# Altium PCB +-15V.PcbDoc
Units mm, origin at the board's own origin, x right, y up, seen from the top; angles counter-clockwise.
Board outline 45 x 32 mm, 2 copper layers (Component Side, Bottom Layer), stack 1.571 mm thick; 35 components, 14 nets, 77 pads, 2 vias.
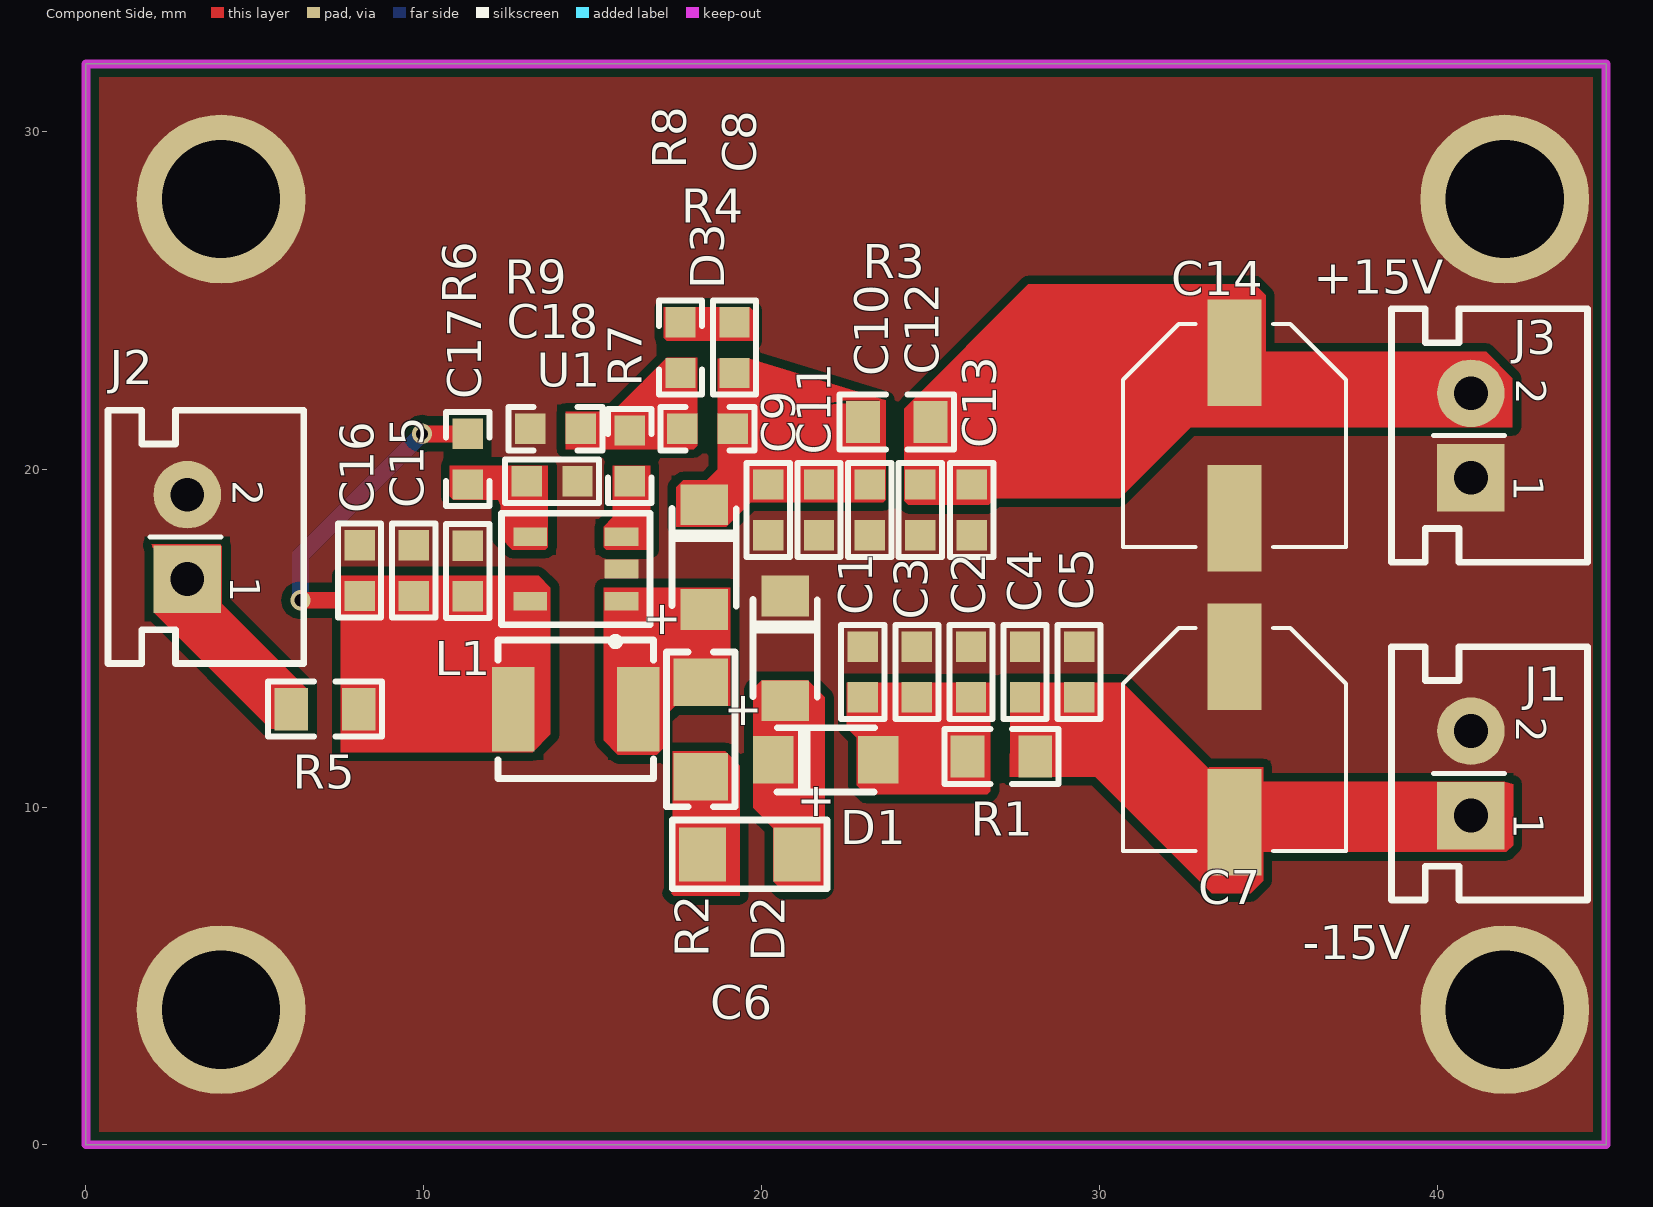
[diagram p0: Component Side view]
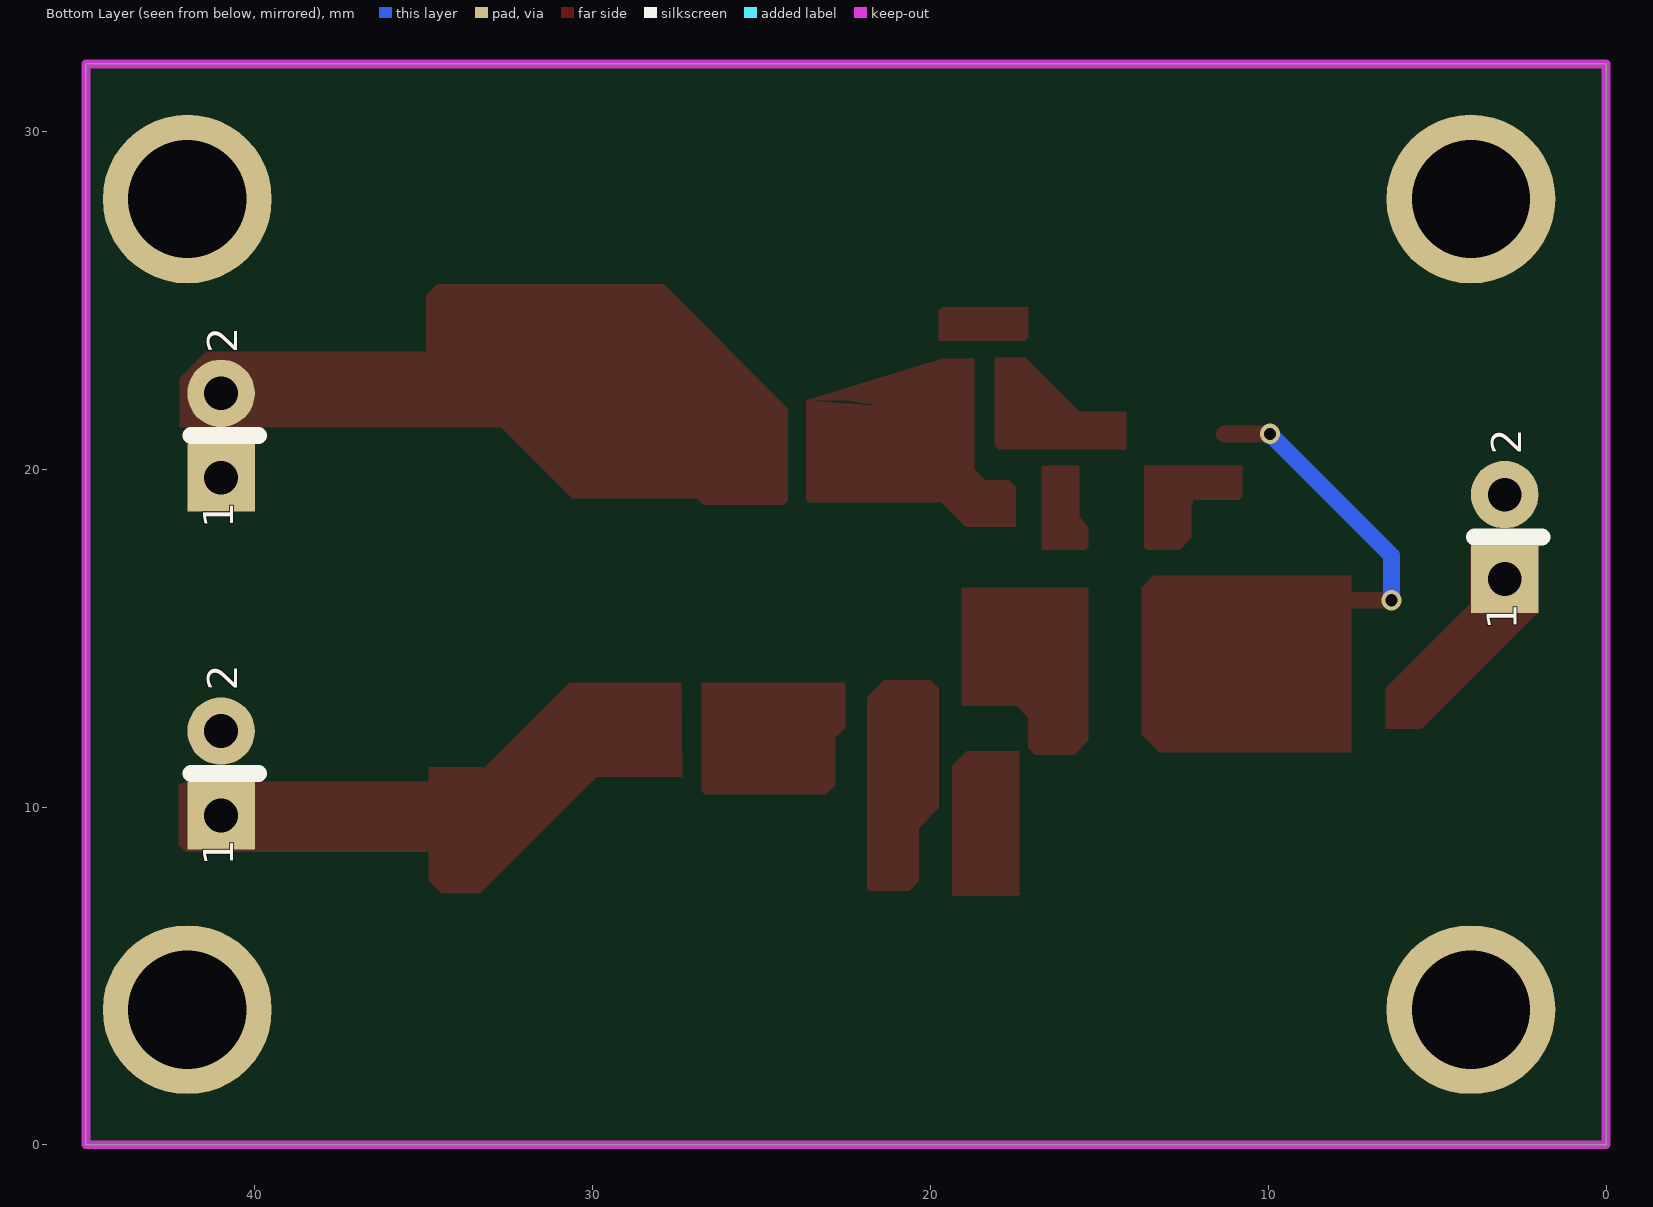
[diagram p1: Bottom Layer view, seen from below]

## Layer stack, top to bottom
Top Solder: solder mask 0.0102, Solder Resist, Dk 3.5
Component Side: signal copper 0.0356
Dielectric 1: core 1.5, FR-4, Dk 4.2
Bottom Layer: signal copper 0.0356
Solder Side: solder mask 0.0102, Solder Resist, Dk 3.5

## Board outline
0,0 45,0 45,32 0,32

## Design rules (kind name [scope] priority, off if disabled: settings)
Clearance [All] p1: gap=0.254 ignorepadtopadclearanceinfootprint=FALSE except(0: Arc-Hole Track-Hole SMDPad-Hole THPad-Hole Via-Hole Fill-Hole Poly-Hole Region-Hole Text-Hole)
PolygonConnect "Polygon pore GND" [InNet('GND')] p1: connectstyle=Direct reliefconductorwidth=0.254 reliefentries=4 polygonreliefangle="90 Angle" airgapwidth=0.254
PolygonConnect [All] p2: connectstyle=Relief reliefconductorwidth=0.254 reliefentries=4 polygonreliefangle="90 Angle" airgapwidth=0.254
RoutingVias [All] p1: holewidth=0.711 width=1.27 viastyle="Through Hole" minholewidth=0.711 minwidth=1.27 maxholewidth=0.711 maxwidth=1.27
SolderMaskExpansion [All] p1: expansion=0.102
Width [All] p1: maxlimit=1 minlimit=0.254 preferedwidth=0.254
30 further rules are at their usual default settings.

## Components (designator, comment, footprint, x,y, rotation, side; value= is the part's Value field where it differs from the comment)
C1 "T542021047508" CAPC0603-RW 23,14 r90 top value=0.1uF
C2 "T542024757408" CAPC0603-RW 26.2,14 r90 top value=4.7uF
C3 "T542024757408" CAPC0603-RW 24.6,14 r90 top value=4.7uF
C4 "T542024757408" CAPC0603-RW 27.8,14 r90 top value=NC
C5 "CAP0603 NC" CAPC0603-RW 29.4,14 r90 top value=NC
C6 "PZL456450-1050" CAPC1206-RW 19.65,8.6 r180 top value=1uF
C7 "T551101445020" "CASE - D8" 34,12 r270 top value=100uF
C8 "PXL456470-2230" CAPC0603-RW 19.2,23.6 r90 top value=0.022uF
C9 "T542021047508" CAPC0603-RW 20.2,18.8 r270 top value=0.1uF
C10 "T542024757408" CAPC0603-RW 23.2,18.8 r270 top value=4.7uF
C11 "T542024757408" CAPC0603-RW 21.7,18.8 r270 top value=4.7uF
C12 "T542024757408" CAPC0603-RW 24.7,18.8 r270 top value=NC
C13 "T542024757408" CAPC0603-RW 26.225,18.8 r270 top value=NC
C14 "T551101445020" "CASE - D8" 34,21 r270 top value=100uF
C15 "T542024757408" CAPC0603-RW 9.7,17 r90 top value=4.7uF
C16 "T542024757408" CAPC0603-RW 8.1,17 r90 top value=4.7uF
C17 "T542021047508" CAPC0603-RW 11.3,16.987 r90 top value=0.1uF
C18 "T542021047508" CAPC0603-RW 13.8,19.65 r0 top value=0.1uF
D1 "RCD100140-0010" subSMA 21.9,11.4 r180 top
D2 "RCD100140-0010" subSMA 20.7,14.7 r90 top
D3 "RCD100140-0010" subSMA 18.3,17.4 r90 top
J1 "CCN250000-0102" "CONN 2P PH=2.5mm B2B-XH-A" 41,11 r270 top value=2.5mm
J2 "CCN250000-0102" "CONN 2P PH=2.5mm B2B-XH-A" 3,18 r270 top value=2.5mm
J3 "CCN250000-0102" "CONN 2P PH=2.5mm B2B-XH-A" 41,21 r270 top value=2.5mm
L1 "T621000053100" "IND CKST0402" 14.5,12.9 r0 top value=10uH
R1 "T502000003009" 0805-RW 27.1,11.5 r0 top value=0R
R2 "QCF045010-1000" 1206-RW 18.2,12.3 r270 top value=10R
R3 "T502000003009" 0805-RW 24,21.4 r0 top value=0R
R4 "QCF011030-1103" 0603-RW 18.4,21.2 r0 top value=110K
R5 "T502000003009" 0805-RW 7.075,12.9 r0 top value=0R
R6 "QCF011030-2204" 0603-RW 11.3,20.3 r90 top value=2.2M
R7 "QCF011030-1002" 0603-RW 16.1,20.4 r270 top value=10K
R8 "QCF011030-1002" 0603-RW 17.6,23.6 r270 top value=10K
R9 "QCF011030-1002" 0603-RW 13.9,21.2 r0 top value=10K
U1 "MP1541DJ" "SOT23-5 P.95" 14.5,17.05 r90 top

## Footprints (in the part's own frame and the unit in brackets; to place one, negate y for a bottom-side part, rotate by r counter-clockwise, add the part's x,y. Pads: shape width x height; smd on the part's side, far side on the other; paste and mask are expansions set on the pad)
0603-RW [mm]
  rect 0.9x0.9 smd: 1(-0.75,0) 2(0.75,0)
  silkscreen extent -1.39,-0.64 1.39,0.64, body extent -0.8,-0.41 0.8,0.39, height 0.3
0805-RW [mm]
  rect 1x1.25 smd: 1(-1,0) 2(1,0)
  silkscreen extent -1.69,-0.82 1.69,0.82, body extent -1,-0.64 1,0.62, height 0.78
1206-RW [mm]
  rect 1.4x1.6 smd: 1(-1.4,0) 2(1.4,0)
  silkscreen extent -2.29,-1.02 2.29,1.02, body extent -1.6,-0.8 1.6,0.8, height 1
CAPC0603-RW [mm] "Body size:  L1.6XW0.8XT0.8mm"
  rect 0.9x0.9 smd: 1(-0.75,0) 2(0.75,0)
  silkscreen extent -1.39,-0.64 1.39,0.64, body extent -0.8,-0.4 0.8,0.4, height 0.8
CAPC1206-RW [mm] "Body size: L3.2XW1.6XT1.0mm"
  rect 1.4x1.6 smd: 1(-1.4,0) 2(1.4,0)
  silkscreen extent -2.29,-1.02 2.29,1.02, body extent -1.6,-0.8 1.6,0.8, height 1
"CASE - D8" [mm] "CHIP ELECT CAP D6.3mm * H7.9mm"
  rect 3.15x1.6 smd: 1(-2.45,0) 2(2.45,0)
  silkscreen extent -3.3,-3.3 3.3,3.3, body extent -3.55,-3.38 3.45,3.22, height 7.7
"CONN 2P PH=2.5mm B2B-XH-A" [mm] "CONN 2P PH=2.5mm B2B-XH-A H7mm"
  rect 2x2 hole 1: 1(1.25,0)
  round 2 hole 1: 2(-1.25,0)
  silkscreen extent -3.75,-2.35 3.75,3.45, body extent -3.7,-2.32 3.7,3.43, height 7
"IND CKST0402" [mm] "4.1X4.6X2.0MM PH3.7MM PAD2.5X1.26MM"
  rect 1.26x2.5 smd: 1(-1.85,0) 2(1.85,0)
  silkscreen extent -2.3,-2.05 2.3,2.05, body extent -2.32,-2.05 2.32,2.05, height 2
"SOT23-5 P.95" [mm]
  rect 0.55x1 smd: 1(-0.95,-1.35) 2(0,-1.35) 3(0.95,-1.35) 4(0.95,1.35) 5(-0.95,1.35)
  silkscreen extent -2.25,-2.2 1.65,2.2, body extent -1.52,-1.5 1.53,1.5, height 1.4
subSMA [mm] "subSMA Body W 1.90mm L 2.90mm Max"
  rect 1.2x1.4 smd: 1(-1.55,0) 2(1.55,0)
  silkscreen extent -1.45,-0.95 1.44,0.95, body extent -1.86,-0.91 1.84,0.89, height 1.35

## Part data
C1 C9 C17 C18: library part "CAP0603 0.1uF 50V 10%_X7R", "CAP X7R .10UF 50V +-10% 0603 WALSIN L", PACKAGE=CAPC0603, Tolerance=10%, Voltage=50V, CREATE_NAME=Nathan, CREATE_TIME=30-Jul-2019, Customer Specific=N/A, DIP&SMD=SMD, MFG=WALSIN, MFG Part=0603B104K500, Other=X7R, SAP=T542021047508, Type=Capacitor
C2 C3 C10 C11 C15 C16: library part "CAP0603 4.7uF 25V 10%_X7R_WALSIN", "CAP X7R 4.7UF 25V +-10% 0603 WALSIN L", PACKAGE=CAPC0603, Tolerance=10%, Voltage=25V, CREATE_NAME=Nathan, CREATE_TIME=13-July-2016, Customer Specific=N/A, DIP&SMD=SMD, MFG=WALSIN, Other=X7R, SAP=T542024757408, Type=Capacitor
C4 C12 C13: library part "CAP0603 NC", "NC", PACKAGE=CAPC0603, CREATE_NAME=Tom, CREATE_TIME=18-Mar-2016, Customer Specific=N/A, DIP&SMD=SMD, Type=Capacitor
C5: "NC", PACKAGE=CAPC0603, CREATE_NAME=Tom, CREATE_TIME=18-Mar-2016, Customer Specific=N/A, DIP&SMD=SMD, Type=Capacitor
C6: library part "CAPC1206 1uF 25V 10% - PZL456450-1050", "GP CHIP CAP  1uF 25V 10%", PACKAGE=CAPC1206, Tolerance=10%, Voltage=25V, Customer Specific=N/A, DIP&SMD=SMD, SAP=T542041057408, Type=Capacitor, Vendor Code=10010262, Vendor Name=¶«Ý¸ÊÐÇ
C7 C14: library part "CAP E 100uF 25V 20% SMD_VEJ101M1ETR-0607", "E 100UF 25V +-20% 6.3X7. VEJ101M1E K", PACKAGE="CASE - C7.7", Tolerance=20%, Voltage=25V, CREATE_NAME=Nathan, CREATE_TIME=01-Mar-2019, Customer Specific=N/A, DIP&SMD=SMD, MFG=LELON, MFG Part=VEJ101M1ETR-0607, SAP=T551101445020, Type=Capacitor
C8: library part "CAP0603 0.022uF 50V 10%", "GP CHIP CAP 0.022uF 50V 10%", PACKAGE=CAPC0603, Tolerance=10%, Voltage=50V, Customer Specific=N/A, DIP&SMD=SMD, SAP=T542022237508, Type=Capacitor, Vendor Code=10010262, Vendor Name=¶«Ý¸ÊÐÇ
D1 D2 D3: library part SS14L-TSC, "SMD Schottky Diode Sub SMA 1A 40V SS14L", Current=1A, PACKAGE=SMA, Voltage=40V, Customer Specific=N/A, DIP&SMD=SMD, MFG=TSC, MFG Part=SS14L, SAP=T571000130604, Type=DIODE
J1 J2 J3: library part "CONN 2P PH=2.5mm B2B-XH-A", "GP CONNECTOR B2B-XH-A 2 PIN G", Current=3A, DIP&SMD=DIP, MFG=½ðÈ, MFG Part=HAA250A-2A-WHITE, SAP=T690300041200, Type=Connector, Vendor Code=10009989, Vendor Name=亿源电
L1: library part "IND 10uH CKST0402-10uH/M", "10UH 2A 100K SMD CENKER CKST040 K", CREATE_NAME=Nathan, CREATE_TIME=27-Sep-2017, DCR=294mΩ, DIP&SMD=SMD, Irms=1.6A, Isat=2A, MFG=CENKER, MFG Part=CKST0402-10uH/M, SAP=T621000053100, Type=INDUCTOR
R1 R3 R5: library part "RES0805 1/8W  0 OHM_WALSIN", "CHIP 0 OHM 0 OHM 0 OHM 0805 WALSI L", PACKAGE=0805, Power=1/8W, CREATE_NAME=Tom, CREATE_TIME=27-Jun-2018, Customer Specific=N/A, DIP&SMD=SMD, MFG=WALSIN, SAP=T502000003009, Type=Resistor
R2: library part "RES1206 1/4W 5% 10 OHM", "CHIP 10 OHM 100PPM +-5% 1206 WALS L", PACKAGE=1206, Power=1/4W, Customer Specific=N/A, DIP&SMD=SMD, MFG="WALSIN (ÈAÐ", SAP=T502010004499, TOL=5%, Type=Resistor, Vendor Code=10010262, Vendor Name=¶«Ý¸ÊÐÇ
R4: library part "RES0603 1/10W 1% 110K OHM", "CHIP RES 110K OHM 1/10W 1% 0603", PACKAGE=0603, Power=1/10W, Customer Specific=N/A, DIP&SMD=SMD, SAP=T502110302399, TOL=1%, Type=Resistor, Vendor Code=10010262, Vendor Name=¶«Ý¸ÊÐÇ
R6: library part "RES0603 1/10W 1% 2.2M OHM", "GP CHIP RES. 2.2M OHM 1/10W 1% 0603", PACKAGE=0603, Power=1/10W, Customer Specific=N/A, DIP&SMD=SMD, SAP=T502220402399, TOL=1%, Type=Resistor, Vendor Code=10010262, Vendor Name=¶«Ý¸ÊÐÇ
R7 R8 R9: library part "RES0603 1/10W 1% 10K OHM", "GP CHIP RES. 10K OHM 1/10W 1% 0603", PACKAGE=0603, Power=1/10W, Customer Specific=N/A, DIP&SMD=SMD, SAP=T502100202399, TOL=1%, Type=Resistor, Vendor Code=10010262, Vendor Name=¶«Ý¸ÊÐÇ
U1: CREATE_NAME=Tom, CREATE_TIME=06-Nov-2019, Customer Specific=N/A, DIP&SMD=SMD, MFG=MPS, MFG Part=MP1541DJ, Type=IC

## Free pads (board coordinates)
  round 5 hole 3.5: 2(4,4) 2(4,28) 2(42,4) 2(42,28)

## Via types
v1: diameter 0.6, hole 0.36, Component Side to Bottom Layer, 2 vias

## Nets (pads, with @x,y where several pads share a name; then routed paths per layer and width w, separated by ;. In a path a pad name is that pad's centre, name@x,y a point inside that pad or via, vN(x,y) a via of type N, cw(c..) or ccw(c..) an arc to the next point about the centre after c; other vN are vias at no path point)
+5V: J2.1 R5.1
+15V: C12.1 C13.1 C14.1 J3.2 R3.2
-15V: C4.1 C5.1 C7.2 J1.1 R1.2
GND: C1.2 C2.2 C3.2 C4.2 C5.2 C7.1 C9.2 C10.2 C11.2 C12.2 C13.2 C14.2 C15.2 C16.2 C17.2 C18.2 D2.2 J1.2 J2.2 J3.1 pad.2 R9.1 U1.2
NetC1_1: C1.1 C2.1 C3.1 D1.1 R1.1
NetC6_1: C6.1 D1.2 D2.1
NetC6_2: C6.2 R2.2
NetC8_1: C8.1 C9.1 C10.1 C11.1 D3.2 R3.1 R4.2
NetC8_2: C8.2 R8.1
NetC15_1: C15.1 C16.1 C17.1 L1.1 R5.2 R6.2 U1.5 | length 9.6
  Component Side w0.5: v1(6.35,16.125) 7.975,16.125 C16.1 ; v1(9.95,21.05) R6.2
  Bottom Layer w0.5: v1(6.35,16.125) 6.35,17.45 v1(9.95,21.05)
NetC18_1: C18.1 R6.1 U1.4
NetD3_1: D3.1 L1.2 R2.1 U1.1
NetR4_1: R4.1 R7.1 R8.2 R9.2
NetR7_2: R7.2 U1.3

## Polygon pours and split planes (outlines as drawn)
GND on Component Side "Component Side-GND" (solid, pour order 12): 0,32 0,0 45,0 45,32
no net on Component Side "Buttom Layer to GND" (solid, remove dead copper, pour order 10): 27,17.05

## Keep-outs
Keep-Out Layer:
  the board outline again, w0.254

## Other copper
Component Side:
  region net GND: 11.9,17.2
  region: 41.9,20.65
  region net -15V: 42,10.75 33.725,10.75 33.55,10.575 33.55,8.675 42.05,8.675 42.25,8.875 42.25,10.675
  region net +15V: 34.925,22.317 30.366,21.25 42.225,21.25 42.225,22.7 41.45,23.475 34.925,23.475
  region net +15V: 24.225,21.8 24.225,19.075 24.35,18.95 26.725,18.95 26.925,19.15 30.6,19.15 33.25,21.8 34.925,21.8 34.925,25.15 34.6,25.475 27.9,25.475
  region net NetC8_1: 19.65,23.275 23.675,22.05 21.55,21.875 22.475,22.05 23.675,22.05 23.675,19.1 23.6,19.025 19.675,19.025 18.95,18.3 17.475,18.3 17.475,19.475 17.675,19.675 18.375,19.675 18.7,20 18.7,23.275
  region net NetC8_2: 17.1,24.8 19.65,24.8 19.75,24.7 19.75,23.8 17.2,23.8 17.1,23.9
  region net NetR4_1: 14.2,21.7 15.6,21.7 17.2,23.3 18.1,23.3 18.1,20.7 18,20.6 14.2,20.6
  region net NetR7_2: 15.6,20.1 15.6,18.575 15.325,18.3 15.325,17.694 15.4,17.619 16.7,17.619 16.7,20.1
  region net NetD3_1: 15.325,16.5 15.325,11.975 15.75,11.55 16.9,11.55 17.1,11.75 17.1,12.65 17.45,13 19.075,13 19.075,16.5
  region net -15V: 27.375,13.675 30.7,13.675 33.225,11.15 33.25,11.175 34.85,11.175 34.85,7.825 34.475,7.45 33.325,7.45 29.875,10.9 27.35,10.9
  region net NetC1_1: 22.525,13.675 22.525,12.35 22.825,12.05 22.825,10.65 23.1,10.375 26.675,10.375 26.775,10.475 26.775,13.675
  region net NetC6_1: 20,13.75 19.75,13.5 19.75,9.975 20.35,9.375 20.35,7.8 20.625,7.525 21.8,7.525 21.875,7.6 21.875,13.25 21.375,13.75
  region net NetC6_2: 17.375,11.65 17.375,7.5 17.325,7.45 17.4,7.375 19.35,7.375 19.35,11.225 18.925,11.65
  region net NetC18_1: 10.775,20.1 13.675,20.1 13.675,17.7 13.6,17.625 12.625,17.625 12.275,17.975 12.275,18.925 12.2,19.1 10.875,19.1 10.775,19.2
  region: 9.625,11.375
  region net NetC15_1: 7.65,12.3 7.55,12.4 7.55,16.85 13.4,16.85 13.75,16.5 13.75,12.15 13.225,11.625 7.55,11.625 7.55,12.375
  region net +5V: 1.95,17.775 3.975,17.775 4.025,17.725 4.025,16.025 6.525,13.525 6.525,12.325 5.45,12.325 2.025,15.75 2.025,17.625 1.975,17.675

## Silkscreen, mask and mechanical layers (free items; w line width, h text height)
Top Overlay:
  text "+15V" at 36.35,25.2 h1
  text "-15V" at 36.025,5.5 h1
Top Paste:
  region: 37.725,15.75 38.025,16.05 38.025,17.125 36.175,17.125 36.175,15.775
  region: 41.9,20.65 42.025,20.525 42.025,11.275 36.35,11.275 34.725,12.9 33.2,12.9 33.2,20.701

## Text inside footprints (layer, text, board x,y; h text height)
D1: Top Overlay "+" at 21.041,10.584 h1 r179.99
D2: Top Overlay "+" at 19.884,13.425 h1 r89.99
D3: Top Overlay "+" at 17.484,16.125 h1 r89.99
J1: Top Overlay "2" at 42.346,12.676 h0.89 r270; Top Overlay "1" at 42.27,9.832 h0.89 r270; Bottom Overlay "2" at 40.517,13.438 h0.89 r270; Bottom Overlay "1" at 40.644,8.257 h0.89 r270
J2: Top Overlay "2" at 4.346,19.676 h0.89 r270; Top Overlay "1" at 4.27,16.832 h0.89 r270; Bottom Overlay "2" at 2.517,20.438 h0.89 r270; Bottom Overlay "1" at 2.644,15.257 h0.89 r270
J3: Top Overlay "2" at 42.346,22.676 h0.89 r270; Top Overlay "1" at 42.27,19.832 h0.89 r270; Bottom Overlay "2" at 40.517,23.438 h0.89 r270; Bottom Overlay "1" at 40.644,18.257 h0.89 r270